# Altium PCB MAGI'sUSBMeterV2.PcbDoc
Units mil, origin at the board's own origin, x right, y up, seen from the top; angles counter-clockwise.
Board outline 6000 x 4000 mil, 2 copper layers (Top Layer, Bottom Layer); 19 components, 11 nets, 94 pads, 25 vias.
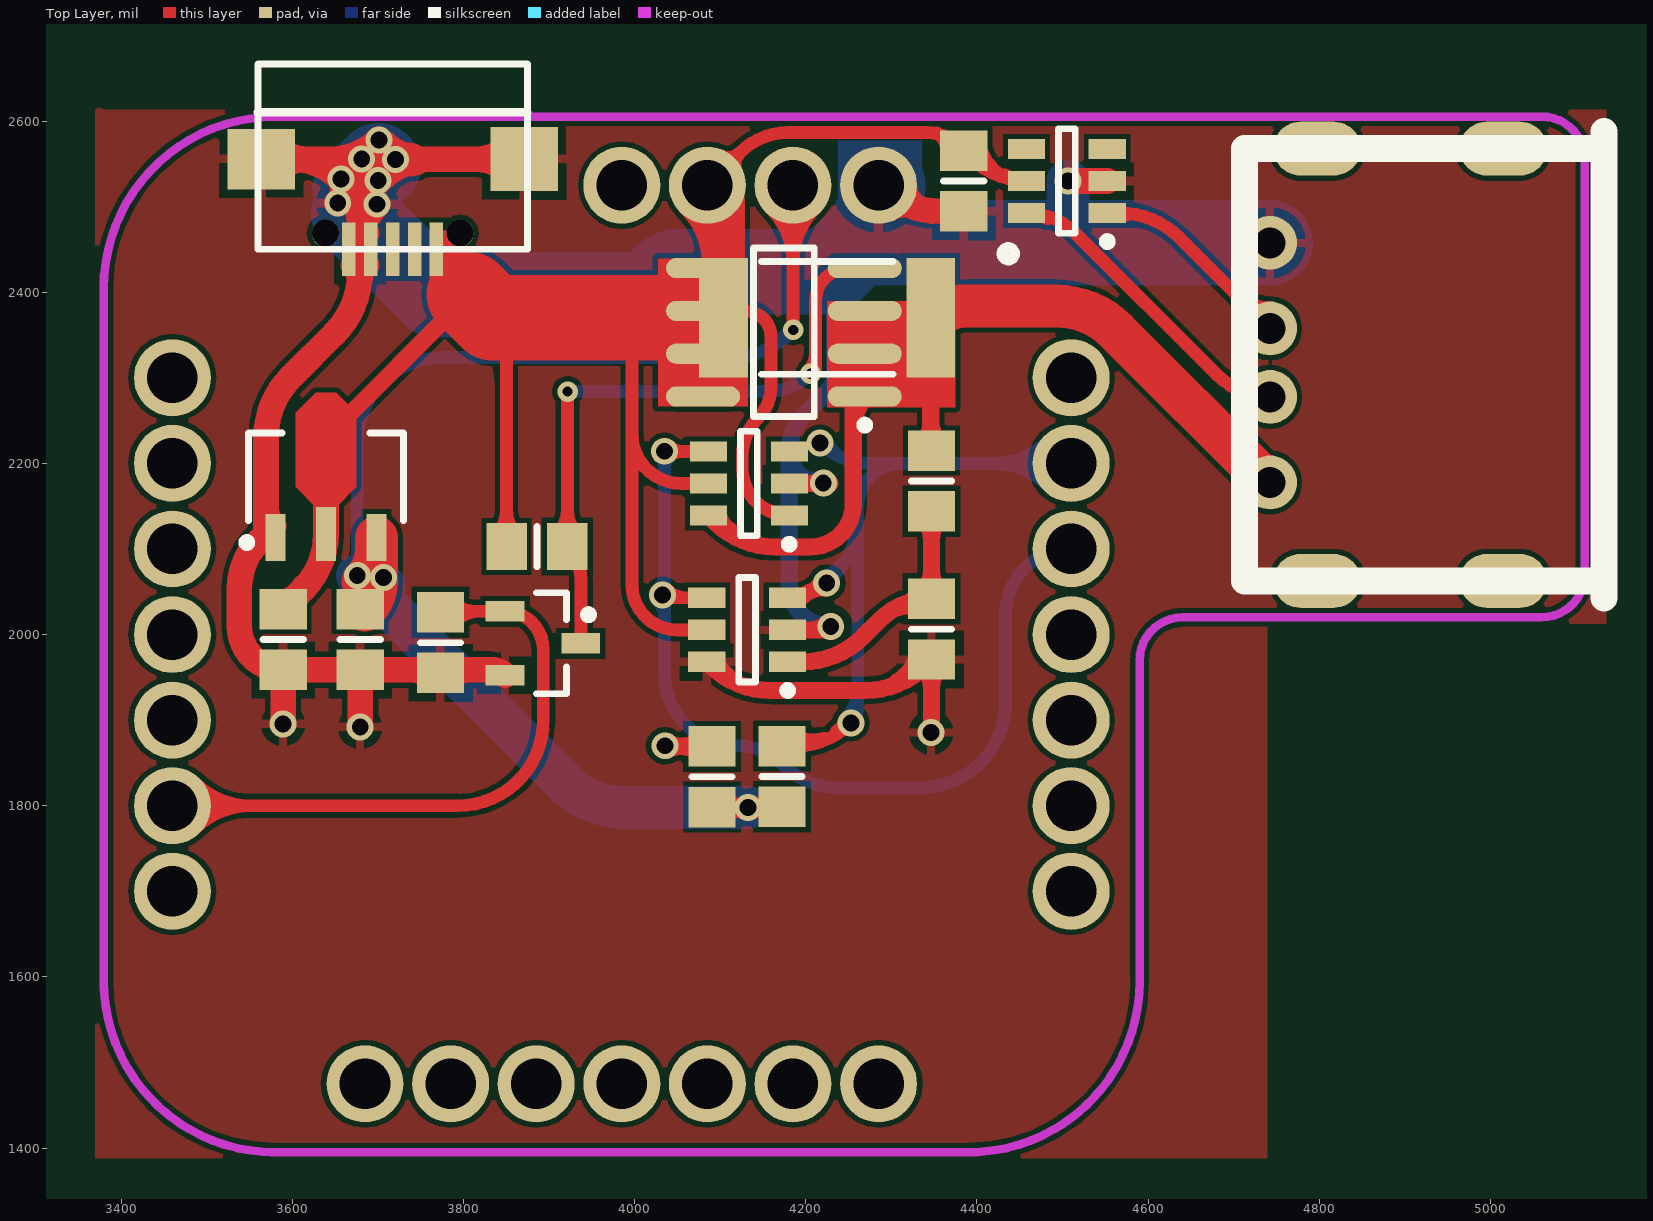
[diagram p0: Top Layer view]
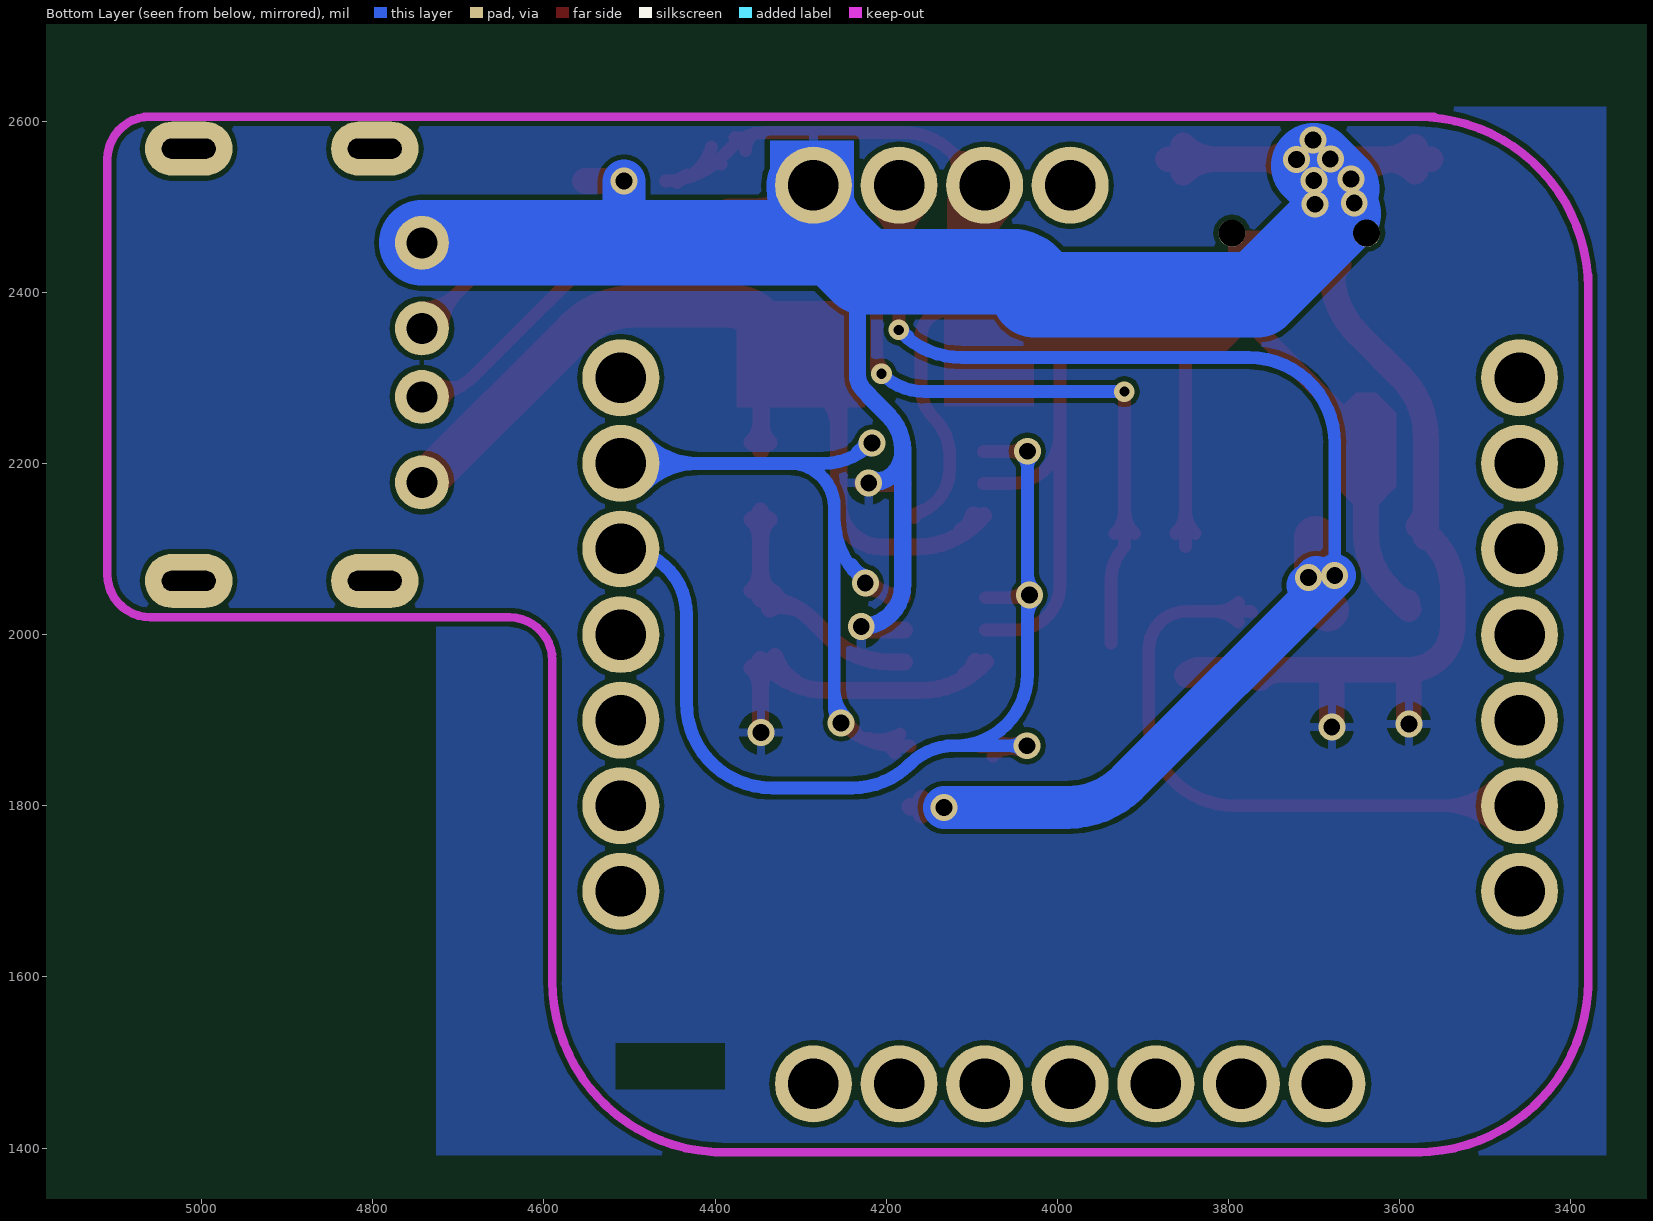
[diagram p1: Bottom Layer view, seen from below]

## Layer stack, top to bottom
Top Solder: solder mask 0.4, Solder Resist, Dk 3.5
Top Layer: signal copper 1.4
Dielectric 1: dielectric 12.6, FR-4, Dk 4.8
Bottom Layer: signal copper 1.4
Bottom Solder: solder mask 0.4, Solder Resist, Dk 3.5

## Board outline
1000,1000 7000,1000 7000,5000 1000,5000

## Design rules (kind name [scope] priority, off if disabled: settings)
Clearance [All] p1: gap=6
PolygonConnect [All] p1: connectstyle=Relief reliefconductorwidth=10 reliefentries=4 polygonreliefangle="90 Angle" airgapwidth=10
RoutingVias [All] p1: holewidth=280 width=500 viastyle="Through Hole" minholewidth=12 minwidth=24 maxholewidth=28 maxwidth=50
SolderMaskExpansion [All] p1: expansion=4
Width [All] p1: maxlimit=100 minlimit=6 preferedwidth=10
29 further rules are at their usual default settings.

## Components (designator, comment, footprint, x,y, rotation, side; value= is the part's Value field where it differs from the comment)
C1 "" 6-0805_N 3589.37,1994.25 r270 top
C2 "" 6-0805_N 3679.37,1994.25 r270 top
C3 "" 6-0805_N 4384.65,2529.92 r270 top
J1 "" MAGI-M8 3985,2000 r0 top
J2 "" USB-04A 4769.96,2315.22 r90 top
Q1 "" SO-8_N 4174.41,2353.15 r180 top
R1 "" 6-0805_N 4346.85,2179.53 r90 top
R2 "" 2512 4225,2370 r0 top
R3 "" 6-0805_N 4346.85,2006.3 r90 top
R5 "" 6-0805_N 3773.23,1990.55 r90 top
R6 "" 6-0805_N 4090.55,1833.86 r90 top
R7 "" 6-0805_N 4172.05,1834.25 r90 top
R8 "" 6-0805_N 3885.83,2102.76 r0 top
U1 "" HS7333 3639.37,2184.25 r90 top
U2 "" MicroUSB 3717.32,2472.83 r0 top
U3 "" TPS2513 4505,2530 r180 top
U4 "" tps2513 4133.46,2176.38 r180 top
U5 "" tps2513 4131.5,2005.51 r180 top
U7 "" SOT23_n 3892.91,1989.76 r0 top

## Footprints (in the part's own frame and the unit in brackets; to place one, negate y for a bottom-side part, rotate by r counter-clockwise, add the part's x,y. Pads: shape width x height; smd on the part's side, far side on the other; paste and mask are expansions set on the pad)
6-0805_N [mm] "Chip Resistor, Body 2.0x1.2mm, IPC Medium Density"
  rect 1.2x1.4 smd: 1(-0.9,0) 2(0.9,0)
  silkscreen extent 0,-0.6 0,0.6, body extent -1.07,-0.7 1.07,0.7, height 0.7
2512 [mm]
  rect 1.45x3.55 smd: 1(-3.075,0) 2(3.075,0)
  silkscreen extent -1.95,-1.68 1.95,1.68, body extent -3.22,-1.7 3.22,1.7, height 0.65
HS7333 [mm] "SOT89, 3-Leads, Body 4.50x2.50mm, Pitch 1.50mm, Lead Span 4.1mm, IPC Medium Density"
  rect 1.4x0.6 smd: 1(-1.8,1.5) 3(-1.8,-1.5)
  rect 1.6x0.6 smd: 2(-1.7,0)
  Top Layer region: -0.9,0.3 -0.3,0.9 1.9,0.9 2.5,0.3 2.5,-0.3 1.9,-0.9 -0.3,-0.9 -0.9,-0.3
  silkscreen extent -2.07,-2.3 1.3,2.47, body extent -1.3,-2.3 1.3,2.3, height 1.6
MAGI-M8 [mil]
  round 90 hole 59.06: 1(300,525) 2(200,525) 3(100,525) 4(0,525) 8(-525,300) 9(-525,200) 10(-525,100) 11(-525,0) 12(-525,-100) 13(-525,-200) 14(-525,-300) 15(-300,-525) 16(-200,-525) 17(-100,-525) 18(0,-525) 19(100,-525) 20(200,-525) 21(300,-525) 22(525,-300) 23(525,-200) 24(525,-100) 25(525,0) 26(525,100) 27(525,200) 28(525,300)
  Keep-Out Layer lines w10: -605,-415 -605,290 -605,420 ; -605,-405 ccw(c-405,-405) -405,-605 ; -605,405 cw(c-405,405) -405,605 ; -425,605 975,605 ; -410,-605 415,-605 ; 405,-605 ccw(c405,-405) 605,-405
  silkscreen extent 445,438 459,452
MicroUSB [mm]
  round 0.8 hole 0.8: 0(-2,-0.1) 0(2,-0.1)
  rect 0.4x1.6 smd: 1(1.3,-0.576) 2(0.65,-0.576) 3(0,-0.576) 4(-0.65,-0.576) 5(-1.3,-0.576)
  rect 2x1.8 smd: 6(-3.9,2.1)
  rect 2x1.9 smd: 7(3.9,2.1)
  silkscreen extent -4,-0.58 4,4.92, body extent -4.1,-0.68 4.1,5.02, height 3
SO-8_N [mm] "SOIC, 8-Leads, Body 4.9x3.9mm, Pitch 1.27mm, IPC Medium Density"
  oval 2.2x0.6 smd: 1(-2.4,1.905) 2(-2.4,0.635) 3(-2.4,-0.635) 4(-2.4,-1.905) 5(2.4,-1.905) 6(2.4,-0.635) 7(2.4,0.635) 8(2.4,1.905)
  silkscreen extent -2.53,-2.5 0.9,2.88, body extent -2,-2.5 2,2.5, height 1.75
SOT23_n [mm] "SOT23, 3-Leads, Body 2.9x1.3mm, Pitch 0.95mm, Lead Span 2.3mm - Reverse Pinning, IPC Medium Density"
  rect 1.15x0.6 smd: 1(1.125,0) 2(-1.125,-0.95) 3(-1.125,0.95)
  silkscreen extent -0.2,-1.5 1.48,1.5, body extent -0.7,-1.5 0.7,1.5, height 1.1
TPS2513 [mm]
  rect 1.1x0.6 smd: 1(-1.2,0.95) 2(-1.2,0) 3(-1.2,-0.95) 4(1.2,-0.95) 5(1.2,0) 6(1.2,0.95)
  silkscreen extent -1.33,-1.55 0.25,1.92, body extent -0.87,-1.52 0.87,1.53, height 1.45
tps2513 [mm]
  rect 1.1x0.6 smd: 1(-1.2,0.95) 2(-1.2,0) 3(-1.2,-0.95) 4(1.2,-0.95) 5(1.2,0) 6(1.2,0.95)
  silkscreen extent -1.33,-1.55 0.25,1.92, body extent -0.87,-1.52 0.87,1.53, height 1.45
USB-04A [mm]
  oval 1.6x2.6 hole 0.6 slot 1.6 at 90 deg: 0(-6.413,-0.699) 0(-6.413,-6.223) 0(6.413,-0.698) 0(6.414,-6.223)
  round 1.6 hole 0.92: 1(-3.492,0.698) 2(-0.953,0.698) 3(1.079,0.699) 4(3.619,0.699)
  silkscreen extent -6.92,-9.21 6.92,1.46

## Part data
C1 C2 C3: library part "CAPACITOR POL", "Capacitor"
J1: library part MAGI-M8
J2: library part USB1
Q1: library part IRF4435, "HEXFET Power MOSFET"
R1 R2 R3 R5 R6 R7 R8: library part RES1_1
U1: library part HS7333
U2: library part MicroUSB2.0
U3: library part TPS2513
U4 U5: library part MCP3421
U7: library part NMOS, "TO252"

## Via types
v1: diameter 31.5, hole 19.68, Top Layer to Bottom Layer, 22 vias
v2: diameter 24, hole 12, Top Layer to Bottom Layer, 3 vias

## Nets (pads, with @x,y where several pads share a name; then routed paths per layer and width w, separated by ;. In a path a pad name is that pad's centre, name@x,y a point inside that pad or via, vN(x,y) a via of type N, cw(c..) or ccw(c..) an arc to the next point about the centre after c; other vN are vias at no path point)
3.3V: C2.1 J1.2 R6.1 R7.1 U1.3 | length 2249.4
  Top Layer w15: J1.2@4158.48,2498.48 cw(c4094.47,2434.47) 4185,2434.47 cw(c4275.53,2434.47) J1.2@4211.52,2498.48 ; J1.2@4169.09,2509.09 cw(c4130.68,2470.68) 4185,2470.68 cw(c4239.32,2470.68) J1.2@4200.91,2509.09 ; J1.2 4185,2351.93 4185.32,2352.25 v2(4185.32,2355.9)
  Top Layer w20: R6.1 cw(c4091.5,1797.48) 4091.5,1798.82 R7.1 ; R6.1@4104.12,1788.79 cw(c4128.32,1764.59) v1@4128.32,1798.82 ; R6.1@4104.12,1808.06 ccw(c4126.42,1830.36) v1@4126.42,1798.82 ; R6.1@4114.25,1795.05 cw(c4119.42,1775.76) v1@4129.41,1793.05 ; R6.1@4116.51,1798.82 cw(c4116.51,1782.25) v1@4128.22,1793.97 ; v1@4135.27,1793.12 cw(c4144.51,1777.88) R7.1@4149.12,1795.1 ; v1@4136.35,1793.97 cw(c4148.06,1782.25) R7.1@4148.06,1798.82 ; R7.1@4158.48,1789.19 ccw(c4135.22,1765.93) 4135.22,1798.82 ccw(c4135.22,1831.71) R7.1@4158.48,1808.45
  Top Layer w50: v1@3682.53,2062.36 ccw(c3644.14,2100.74) U1.3@3698.43,2100.74 ; v1@3698.43,2075.69 U1.3 ; C2.1@3684.28,2028.71 ccw(c3650.14,2062.86) 3698.43,2062.86 cw(c3650.14,2062.86) C2.1@3684.28,2028.71
  Bottom Layer w10: J1.2@4157.01,2497.01 J1.2
  Bottom Layer w15: v1@3670.15,2074.73 ccw(c3656.07,2088.81) 3675.98,2088.81 ccw(c3695.9,2088.81) v1@3681.82,2074.73 ; v1(3675.98,2068.9) 3675.98,2223.62 cw(c3775.98,2223.62) 3775.98,2323.62 4111.62,2323.62 ccw(c4111.62,2423.62) 4182.33,2352.91 v2(4185.32,2355.9) ; 4174.17,2348.2 ccw(c4166.87,2360.84) v2@4180.97,2357.07
  Bottom Layer w50: v1@3697.44,2066.54 ccw(c3743.54,2066.54) 3710.94,2033.94 ; v1@3707.43,2057.31 cw(c3704.26,2097.17) v1(3675.98,2068.9) 3917.56,1827.32 ccw(c3988.27,1898.03) 3988.27,1798.03 v1(4132.28,1798.03)
  other v1: 3706.69,2066.54
5V: C1.1 C3.1 J1.3 Q1.5 Q1.6 Q1.7 Q1.8 R2.1 R8.1 U1.2 U2.1 U3.5 U4.1 U4.5 U5.5 | length 2796.6
  Top Layer w15: 3833.94,2370 cw(c3833.94,2353.54) 3850.39,2353.54 R8.1 ; R8.1@3838.99,2118.09 ccw(c3811.47,2145.61) 3850.39,2145.61 ccw(c3889.32,2145.61) R8.1@3861.79,2118.09 ; 3993.7,2370 cw(c3993.7,2366.85) 3996.85,2366.85 3996.85,2234.65 ; Q1.6 4103.94,2378.15 4128.79,2378.15 cw(c4128.79,2347.44) 4159.45,2349.16 cw(c4128.79,2347.44) 4159.5,2347.44 4159.5,2289.98 cw(c4107.05,2289.98) 4144.14,2252.89 ccw(c4188.57,2208.46) 4142.98,2251.7 ccw(c4188.57,2208.46) 4125.73,2208.46 ccw(c4195.4,2208.46) 4125.73,2208.34 4125.73,2193.95 ccw(c4180.71,2193.95) U4.1 ; U5.5 4049.61,2005.51 cw(c4049.61,2058.27) 3996.85,2058.27 3996.85,2234.65 ; J1.3 4123.42,2563.42 ; U4.5 4055.12,2176.38 cw(c4055.12,2234.65) 3996.85,2234.65 ; J1.3@4100.38,2559.2 ccw(c4108.84,2578) 4123.42,2563.42 ; J1.3@4119.2,2540.38 cw(c4138,2548.84) 4123.42,2563.42 ; 4155.53,2145.72 cw(c4150.59,2127.27) U4.1@4167.13,2136.82 ; 4353.18,2585.83 cw(c4341.78,2566.07) C3.1@4364.59,2565.65 ; C3.1@4357.3,2583.45 ccw(c4369.97,2605.4) C3.1@4376.53,2580.93 ; C3.1@4392.76,2549.78 cw(c4398.29,2529.13) C3.1@4408.98,2547.65 ; C3.1@4404.16,2569.53 ccw(c4458.69,2584.14) 4430.46,2535.24 ; 4432.58,2536.75 cw(c4427.63,2518.29) U3.5@4444.18,2527.84 ; U3.5 cw(c4457.76,2621.15) 4393.3,2556.7 C3.1 4379.17,2570.83 ccw(c4341.34,2533) 4341.34,2586.5 4179.13,2586.5 ccw(c4179.13,2507.71) 4123.42,2563.42
  Top Layer w20: 3638.98,2230.32 3639.95,2230.32 3806.79,2397.15
  Top Layer w30: C1.1 3612.76,2053.07 ccw(c3548.5,2117.32) U1.2 3639.37,2170.62 ccw(c3617.86,2170.62) 3633.07,2185.83 ; C1.1@3591.08,2038.01 ccw(c3581.14,2075.1) 3614.39,2055.9
  Top Layer w50: J1.3@4070.86,2510.86 cw(c3991,2431) R2.1@4103.94,2431 ; J1.3 4103.94,2506.06 R2.1@4103.94,2378.15
  Top Layer w100: 3806.79,2397.15 3833.94,2370 3993.7,2370 Q1.6@4072.44,2370
D5: J1.13 R5.2 U7.3 | length 1007.4
  Top Layer w15: J1.13 3793.31,1800 ccw(c3793.31,1900) 3893.31,1900 3893.31,1982.48 ccw(c3848.62,1982.48) U7.3 3776.08,2027.17 ccw(c3776.08,2023.13) R5.2 ; J1.13@3475.91,1784.09 cw(c3514.32,1745.68) 3514.32,1800 cw(c3514.32,1854.32) J1.13@3475.91,1815.91 ; J1.13@3486.52,1773.48 cw(c3550.53,1709.47) 3550.53,1800 cw(c3550.53,1890.53) J1.13@3486.52,1826.52 ; R5.2@3788.57,2014.58 cw(c3818.94,1984.21) 3818.94,2027.17 ; R5.2@3788.57,2037.38 ccw(c3813.24,2062.05) 3813.24,2027.17
DM1: J2.2 U3.6 | length 441.7
  Top Layer w15: U3.6 cw(c4457.76,2411.81) 4514.88,2468.94 4680.39,2303.43 ccw(c4742.46,2365.49) J2.2 ; U3.6@4471.33,2494.75 ccw(c4487.88,2504.31) 4482.93,2485.85 ; J2.2@4719.82,2269.78 ccw(c4690.55,2259.52) 4698.57,2289.48 ccw(c4706.6,2319.43) J2.2@4726.82,2295.91
DP1: J2.3 U3.1 | length 343.8
  Top Layer w15: U3.1 4566.16,2492.6 cw(c4566.16,2392.6) 4636.87,2463.31 J2.3 ; U3.1@4564.24,2488.86 cw(c4571.24,2476.74) 4574.87,2490.26 ; J2.3@4718.46,2357.72 ccw(c4660.53,2357.72) 4701.5,2398.68 ccw(c4742.46,2439.64) J2.3@4742.46,2381.71
GND: C1.2 C2.2 C3.2 J1.1 J2.4 R3.1 R5.1 U1.1 U2.4 U2.5 U2.6 U2.7 U3.2 U4.2 U5.2 U5.6 U7.2 | length 5182.9
  Top Layer w20: U5.6 4088.43,1963.93 ccw(c4159.14,2034.65) 4159.14,1934.65 4269.21,1934.65 ccw(c4269.21,2034.65) 4339.92,1963.93 R3.1 v1@4346.85,1885.43 ; U5.6@4095.84,1968.58 ccw(c4121.34,1975.41) 4108.14,1952.55 ; U5.2 4226.61,2005.51 ccw(c4226.61,2006.86) v1@4227.56,2005.91 ; U4.2 v1@4227,2176.38 ; 4204.69,2176.38 ccw(c4204.69,2192.94) v1@4216.41,2181.23 ; 4205.75,2005.51 ccw(c4205.75,2032.83) v1@4225.07,2013.51 ; v1(4220.47,2177.17) 4226.21,2177.17 v1@4227,2176.38 ; v1@4227.95,2176.77 cw(c4227,2177.72) v1@4227,2176.38 ; 4307.27,1945.08 ccw(c4283.13,1986.88) R3.1@4329.76,1974.39 ; R3.1@4337.22,1961.23 cw(c4313.96,1937.98) 4346.85,1937.98 cw(c4379.74,1937.98) R3.1@4356.48,1961.23
  Top Layer w30: U2.6 v1(3681.1,2555.49) ; 3569.41,2147.75 ccw(c3598.93,2147.75) U1.1@3578.06,2126.88 ; U2.6@3582.17,2541.04 cw(c3617.05,2506.16) 3617.05,2555.49 cw(c3617.05,2604.82) U2.6@3582.17,2569.94 ; v1(3589.37,1895.67) C1.2 ; U2.6@3599.25,2555.49 cw(c3599.25,2474.45) 3656.56,2531.75 cw(c3603,2478.2) 3678.74,2478.2 ; 3645.15,2555.49 ccw(c3645.15,2633.98) v1@3700.65,2578.48 ; v1@3651.9,2504.16 ccw(c3636.23,2520.97) v1@3656.43,2531.93 ; v1@3652.78,2504.98 ccw(c3627.09,2549.79) v1@3678.74,2549.79 ; v1@3657.83,2532.28 cw(c3681.1,2532.22) v1(3681.1,2555.49) ; U2.5@3671.18,2431.59 cw(c3652.93,2413.34) 3678.74,2413.34 ; 3678.74,2412.95 cw(c3704.57,2412.95) U2.4@3686.84,2431.74 ; 3678.74,2452.48 cw(c3749.1,2452.48) v1@3699.35,2502.23 ; 3678.74,2476.23 cw(c3754.48,2476.23) 3700.92,2529.79 cw(c3762.98,2467.73) 3762.98,2555.49 ; 3678.74,2487.96 ccw(c3705.89,2487.96) U2.4@3686.69,2468.76 ; v1(3679.37,1891.97) C2.2 ; v1@3679.75,2545.96 ccw(c3699.15,2551.09) v1@3700.35,2531.06 ; v1@3699.32,2503.31 cw(c3741.51,2549.79) v1@3678.74,2549.79 ; v1@3701.71,2578.48 ccw(c3757.21,2633.98) 3757.21,2555.49 ; v1@3706.45,2533.77 ccw(c3687.18,2560.53) v1@3719.73,2555.24 ; v1@3707.75,2574.18 cw(c3690.59,2550.11) v1@3719.73,2554.99 ; v1@3720.9,2555.73 ccw(c3737.88,2580.02) 3744.67,2551.18 ; v1@3720.97,2554.56 cw(c3735.19,2538.76) 3739.97,2559.47 ; 3739.54,1958.82 cw(c3739.54,1925.37) R5.1@3763.19,1949.02 ; R5.1@3783.26,1949.02 cw(c3806.91,1925.37) 3806.91,1958.82 ; U7.2 ccw(c3833.03,1936.77) 3833.03,1958.82 C2.2 ; U2.7@3853.06,2539.65 ccw(c3814.82,2501.41) 3814.82,2555.49 ccw(c3814.82,2609.57) U2.7@3853.06,2571.33 ; U2.7 v1(3681.1,2555.49) ; J1.1@4296.14,2536.14 J1.1 4286.22,2523.78 ccw(c4356.93,2594.49) 4356.93,2494.49 C3.2 ; J1.1@4298.93,2498.43 cw(c4314.5,2468.71) 4331.27,2497.77 cw(c4347.55,2525.97) J1.1@4315,2525.46 ; v1(4506.3,2530) U3.2 ; C1.2 cw(c3589.37,2010) 3538.19,2010 3538.19,2053.21 cw(c3618.84,2053.21) 3561.81,2110.24 cw(c3569.41,2102.63) 3569.41,2113.39 3569.41,2230.36 cw(c3669.41,2230.36) 3598.7,2301.07 3649.45,2351.81 ccw(c3578.74,2422.52) 3678.74,2422.52 v1@3678.74,2549.79 ; C1.2 C2.2 ; v1@3678.74,2549.79 cw(c3686.81,2549.79) v1(3681.1,2555.49)
  Bottom Layer w20: 4204.96,2180.48 ccw(c4209.27,2196.57) v1@4217.6,2182.14 ; v1(4220.47,2177.17) 4217.32,2177.17 cw(c4217.32,2213.78) 4180.71,2213.78 ; 4226.55,2423.71 cw(c4209.73,2406.9) 4233.51,2406.9 4233.51,2303.07 cw(c4209.5,2303.07) 4226.48,2286.09 4220.98,2280.59 cw(c4218.68,2280.59) 4220.31,2278.97 4197.64,2256.3 ccw(c4238.51,2215.43) 4180.71,2215.43 4180.71,2213.78 ; v1(4229.13,2009.45) cw(c4229.13,2057.87) 4180.71,2057.87 4180.71,2213.78
  Bottom Layer w50: 4501.97,2457.72 4506.3,2462.05 v1(4506.3,2530)
  Bottom Layer w100: 3671.9,2491.59 3766.34,2397.15 4026.77,2397.15 cw(c4053.62,2397.15) 4053.62,2424 4226.55,2424 4226.55,2423.71 4260.55,2457.72 4501.97,2457.72 J2.4 ; 3673.62,2520.87 3700.39,2547.64 ; 4263.25,2460.41 ccw(c4198.66,2525) 4290,2525 cw(c4198.66,2525) 4263.25,2460.41
  other v1: 4346.46,1885.43 3698.82,2502.76 3653.15,2504.33 3700.39,2530.32 3657.09,2532.28 3720.47,2555.12 3701.18,2577.95
NetQ1_4: Q1.4 R8.2 U7.1 | length 840.7
  Top Layer w15: R8.2@3909.86,2118.09 ccw(c3881.39,2146.57) 3921.65,2146.57 ; 3921.65,2144.66 ccw(c3959.23,2144.66) R8.2@3932.66,2118.09 ; v2(3921.65,2283.86) 3921.65,2102.76 R8.2 cw(c3882.77,2064.26) 3937.2,2064.26 U7.1 ; v2@4202.33,2307.91 ccw(c4180.19,2330.05) 4211.5,2330.05 ; v2(4205.51,2304.72) 4211.5,2310.71 4211.5,2389.68 cw(c4249.96,2389.68) 4249.96,2428.15 Q1.4
  Bottom Layer w15: v2(3921.65,2283.86) 4155.14,2283.86 ccw(c4155.14,2355.1) v2(4205.51,2304.72)
SCL: J1.27 R7.2 U4.3 U5.3 | length 1367.4
  Top Layer w15: R7.2 4187.17,1869.68 ccw(c4187.17,1962.43) v1(4252.76,1896.85) ; U5.3 U5.3@4198.03,2042.91 ; R7.2@4184.05,1883.65 ccw(c4208.45,1925.92) 4221.08,1878.77 ; U5.3@4188.58,2047.22 ccw(c4188.58,2080.44) v1@4212.07,2056.95 ; R7.2@4189.95,1861.62 cw(c4215.09,1847.11) 4207.58,1875.15 ; U5.3@4198.84,2049.32 cw(c4214.07,2022.95) v1@4222.2,2052.29 ; v1@4223.59,2052.03 ccw(c4220.42,2020.53) U5.3@4198.03,2042.91 ; v1(4224.41,2060.24) 4215.35,2060.24 U5.3@4198.03,2042.91 ; v1@4244.79,1898.99 cw(c4225.56,1904.14) 4235.51,1886.89 cw(c4245.47,1869.65) v1@4250.62,1888.88
  Bottom Layer w15: v1(4216.54,2223.62) ccw(c4273.56,2280.65) 4273.56,2200 4311.89,2200 ; v1@4218.67,2215.65 cw(c4223.82,2196.42) 4233.78,2213.67 cw(c4243.74,2230.91) v1@4224.5,2225.76 ; v1@4222.27,2068.2 ccw(c4214.59,2096.88) 4240.3,2082.04 ; v1(4224.41,2060.24) 4232.23,2068.06 ccw(c4163.68,2136.61) 4260.63,2136.61 ; v1@4246.92,1902.68 ccw(c4213.83,1935.77) 4260.63,1935.77 ; v1@4251.41,1904.99 ccw(c4249.61,1915.86) 4260.63,1915.86 ; v1(4252.76,1896.85) ccw(c4233.75,1915.86) 4260.63,1915.86 ; J1.27@4483.48,2173.48 ccw(c4419.47,2109.47) 4419.47,2200 ccw(c4419.47,2290.53) J1.27@4483.48,2226.52 ; J1.27@4494.09,2184.09 ccw(c4455.68,2145.68) 4455.68,2200 ccw(c4455.68,2254.32) J1.27@4494.09,2215.91 ; J1.27 4311.89,2200 ; 4260.63,1915.86 4260.63,2136.61 ; 4260.63,2136.61 4260.63,2148.74 cw(c4311.89,2148.74) 4311.89,2200
SDA: J1.26 R6.2 U4.4 U5.4 | length 1539.5
  Top Layer w15: v1(4032.68,2046.06) ccw(c4040.28,2053.67) 4040.28,2042.91 U5.4 ; v1(4035.04,2214.17) ccw(c4035.99,2215.12) 4035.99,2213.78 U4.4 ; v1@4035.43,1869.29 R6.2 ; v1@4038.51,2051.9 ccw(c4060.19,2073.58) 4060.19,2042.91 ; v1@4039.56,1862.94 cw(c4053.63,1838.56) 4060.92,1865.75 ; v1@4040.4,1876.67 ccw(c4054.51,1895.38) 4060.57,1872.74 ; v1@4040.87,2208.34 cw(c4054,2195.21) 4054,2213.78 ; v1@4040.87,2220.01 ccw(c4055.9,2235.04) 4055.9,2213.78 ; v1@4041.27,1864.25 cw(c4053.44,1852.07) 4053.44,1869.29 ; v1@4041.27,1875.91 ccw(c4057.25,1891.89) 4057.25,1869.29 ; R6.2@4075.21,1857.89 ccw(c4047.69,1830.37) 4047.69,1869.29 ccw(c4047.69,1908.21) R6.2@4075.21,1880.69
  Bottom Layer w15: v1@4026.84,2040.23 cw(c4007.06,2020.45) 4035.04,2020.45 ; v1@4026.84,2051.9 ccw(c4007.06,2071.68) 4035.04,2071.68 ; v1@4029.21,2208.34 cw(c4015.13,2194.26) 4035.04,2194.26 cw(c4054.95,2194.26) v1@4040.87,2208.34 ; v1(4035.04,2214.17) 4035.04,1953.94 ccw(c4118.9,1953.94) 4118.9,1870.08 ; v1(4035.43,1870.08) 4118.9,1870.08 ; v1@4041.27,1864.25 cw(c4055.35,1850.17) 4055.35,1870.08 cw(c4055.35,1889.99) v1@4041.27,1875.91 ; J1.26 ccw(c4510,2023.46) 4433.46,2023.46 4433.46,1920.87 cw(c4333.46,1920.87) 4392.49,1840.15 cw(c4333.46,1920.87) 4333.46,1820.87 4239.53,1820.87 cw(c4239.53,1916.3) 4172.05,1848.82 ccw(c4120.72,1797.49) 4120.72,1870.08 4118.9,1870.08
VOUT: J2.1 Q1.1 Q1.2 Q1.3 R1.2 R2.2 U4.6 | length 1535
  Top Layer w20: U4.6 4093.55,2131.65 ccw(c4164.26,2202.36) 4164.26,2102.36 4205.51,2102.36 ccw(c4205.51,2152.36) 4255.51,2152.36 4255.51,2279.45 cw(c4346.06,2279.45) R2.2 4346.06,2216.86 ccw(c4348.75,2216.86) R1.2 ; U4.6@4097.81,2139.45 ccw(c4127.11,2147.29) 4111.94,2121.03 ; 4255.51,2241.46 cw(c4305.59,2241.46) Q1.1@4270.18,2276.87 ; 4261.7,2302.53 ccw(c4282.29,2297.01) Q1.1@4269.95,2279.63 ; Q1.2@4282.61,2331.98 cw(c4296.2,2329.05) 4288.66,2340.73 ; Q1.2@4302.16,2327.77 cw(c4362.96,2314.68) R2.2@4329.22,2366.92 ; R2.2@4330,2379.27 cw(c4291.23,2401.66) 4302.82,2358.41 cw(c4314.41,2315.17) R2.2@4336.79,2353.94 ; R2.2@4332.95,2315.55 cw(c4301.3,2283.89) 4346.06,2283.89 cw(c4390.83,2283.89) R2.2@4359.18,2315.55 ; R1.2@4337.22,2224.59 ccw(c4315.86,2245.95) 4346.06,2245.95 ; 4346.06,2249.75 ccw(c4381.64,2249.75) R1.2@4356.48,2224.59
  Top Layer w50: R2.2 cw(c4379.52,2336.54) 4379.52,2383.86 ; R2.2@4348.57,2367.49 cw(c4388.07,2327.99) 4388.07,2383.86 ; R2.2@4348.96,2367.97 cw(c4379.52,2346.54) 4379.52,2383.86 ; J2.1 cw(c4742.46,2184.23) 4737.86,2179.62 4562.91,2354.57 ccw(c4492.2,2283.86) 4492.2,2383.86 4379.52,2383.86
VS: R1.1 R3.2 U5.1 | length 447.9
  Top Layer w20: U5.1 4195.98,1968.11 ccw(c4195.98,2068.11) 4266.69,1997.4 4285.69,2016.4 cw(c4346.85,1955.24) R3.2 R1.1 ; 4309.03,2031.6 ccw(c4299.62,2066.73) R3.2@4331.12,2048.54 ; 4313.79,2032.87 cw(c4321.4,2004.47) R3.2@4336.1,2029.94 ; R3.2@4337.22,2051.36 ccw(c4313.96,2074.62) 4346.85,2074.62 ccw(c4379.74,2074.62) R3.2@4356.48,2051.36 ; R1.1@4337.22,2134.46 cw(c4313.96,2111.21) 4346.85,2111.21 cw(c4379.74,2111.21) R1.1@4356.48,2134.46
pads on no net: J1.4 J1.8 J1.9 J1.10 J1.11 J1.12 J1.14 J1.15 J1.16 J1.17 J1.18 J1.19 J1.20 J1.21 J1.22 J1.23 J1.24 J1.25 J1.28 J2.0 U2.0 U2.2 U2.3 U3.3 U3.4

## Polygon pours and split planes (outlines as drawn)
GND on Top Layer "Bottom Layer-No Net" (solid, pour order 2): 3380.42,2612.9 5135.04,2612.9 5135.04,2017.9 5135.04,2012.9 4739.18,2012.9 4739.18,1387.9 3369.72,1387.9 3369.72,2617.9
GND on Bottom Layer "Bottom Layer-No Net" (solid, pour order 4): 3358.91,2616.8 3358.91,2616.56 5126.23,2616.56 5126.23,2016.56 5126.23,2015.34 4725.78,2015.34 4725.78,1391.56 3358.91,1391.56

## Keep-outs
Keep-Out Layer:
  lines w10: 4590,1595 4590,1970 cw(c4640,1970) 4640,2020 ; 4640,2020.22 5059.96,2020.22 ccw(c5059.96,2070.22) 5109.96,2070.22 5109.96,2555.22 ccw(c5059.96,2555.22) 5059.96,2605.22 4960,2605.22

## Other copper
Top Layer:
  rectangle net VOUT: 4225,2265.35 4374.8,2389.68
  rectangle net 5V: 4027.17,2266.54 4132.68,2439.37
  rectangle net 5V: 3760.63,2390.55 3800.39,2472.05
Bottom Layer:
  rectangle net GND: 4237.4,2469.68 4335.83,2577.17

## Silkscreen, mask and mechanical layers (free items; w line width, h text height)
Top Solder: